# Altium PCB behind_v1.0.PcbDoc
Units mil, origin at the board's own origin, x right, y up, seen from the top; angles counter-clockwise.
Board outline 1210.03 x 2075.03 mil, 2 copper layers (Top Layer, Bottom Layer); 14 components, 19 nets, 44 pads, 3 vias.
Unrouted connection lines stored in the file: 7.
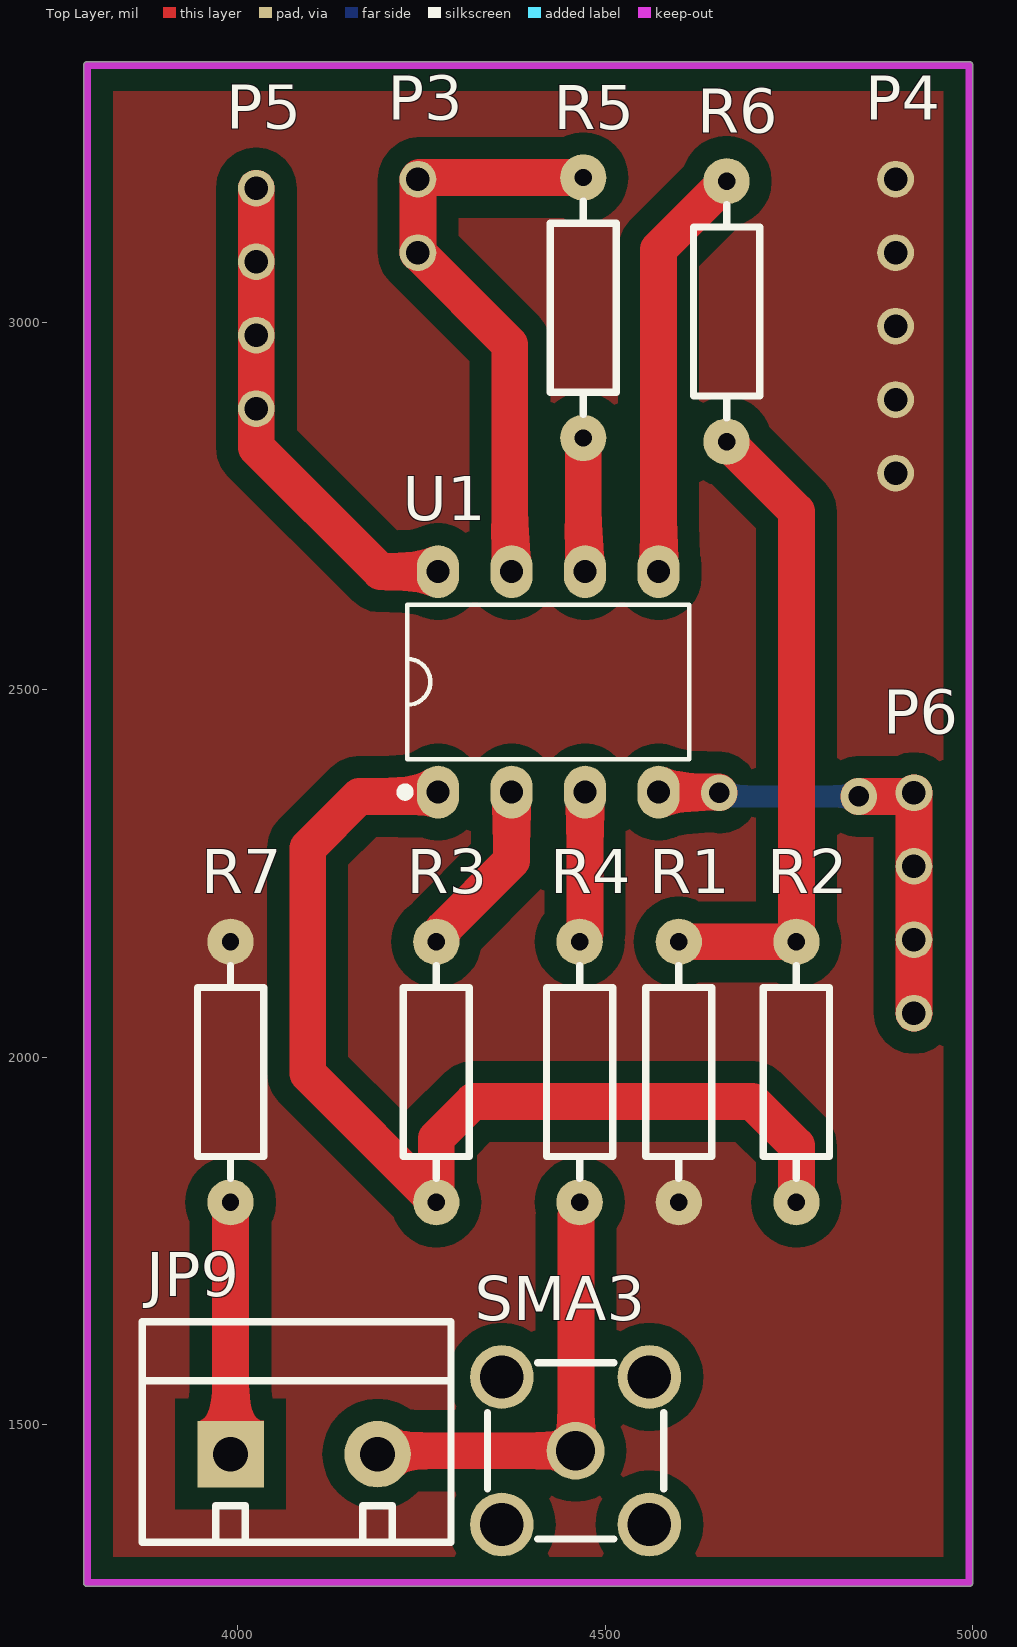
[diagram p0: Top Layer view]
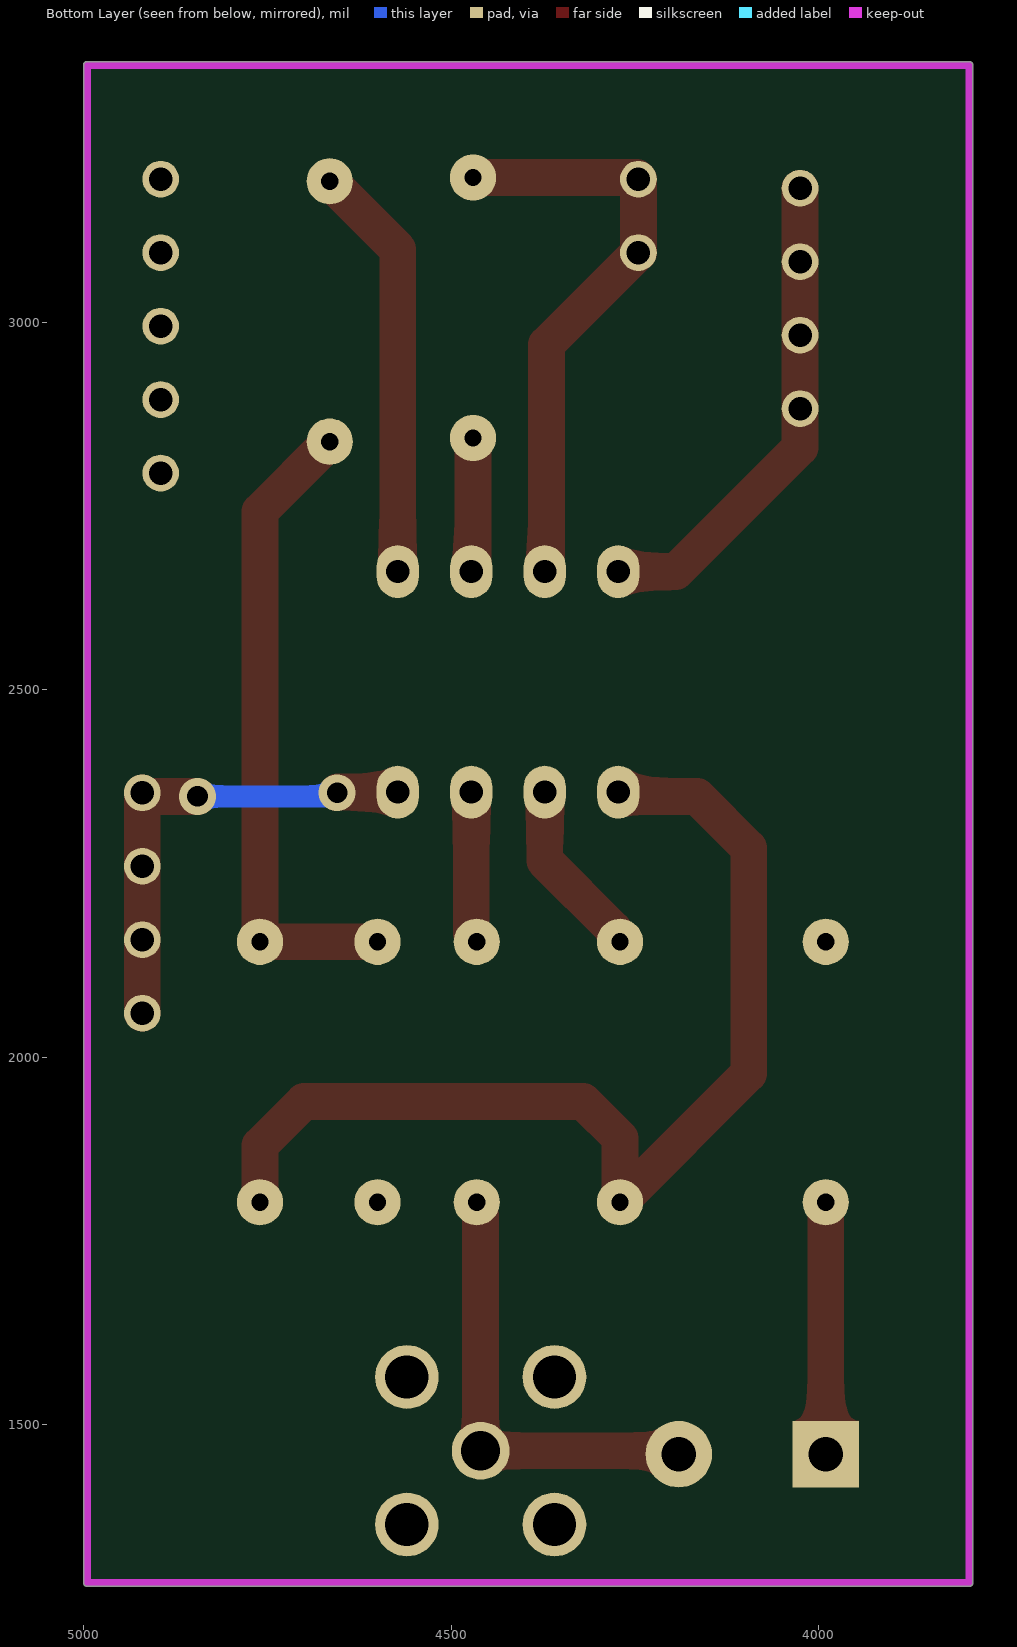
[diagram p1: Bottom Layer view, seen from below]

## Layer stack, top to bottom
Top Solder: solder mask 0.4, Solder Resist, Dk 3.5
Top Layer: signal copper 1.4
Dielectric 1: dielectric 12.6, FR-4, Dk 4.8
Bottom Layer: signal copper 1.4
Bottom Solder: solder mask 0.4, Solder Resist, Dk 3.5

## Board outline
3789.99,1285 3789.98,3350 cw(c3795,3350) 3795,3355.01 4995,3355.01 cw(c4995,3350) 5000.01,3350 5000.02,1285 cw(c4995,1285) 4995,1279.98 3795,1279.98 cw(c3795,1285)

## Design rules (kind name [scope] priority, off if disabled: settings)
Clearance [All] p1: gap=30 ignorepadtopadclearanceinfootprint=FALSE except(20: Arc-Hole Track-Hole SMDPad-Hole THPad-Hole Via-Hole Fill-Hole Poly-Hole Region-Hole Text-Hole)
PolygonConnect [All] p1: connectstyle=Direct reliefconductorwidth=10 reliefentries=4 polygonreliefangle="90 Angle" airgapwidth=10
RoutingVias [All] p1: holewidth=28 width=50 viastyle="Through Hole" minholewidth=28 minwidth=50 maxholewidth=28 maxwidth=50
SolderMaskExpansion [All] p1: expansion=4 istentingtop=FALSE
Width [All] p1: maxlimit=300 minlimit=10 preferedwidth=30 minimp=50.000000 maximp=50.000000 favimp=50.000000
30 further rules are at their usual default settings.

## Components (designator, comment, footprint, x,y, rotation, side; value= is the part's Value field where it differs from the comment)
JP9 "HDR-1X2" KF301-5.0-2P 3990,1460 r0 top
P3 "DIP 1x2" HDR1X2_2.54_180 4245,3195 r0 top value=2.54
P4 "HDR1x5_2.54" HDR1X5_2.54_180 4895,3195 r0 top
P5 "HDR1x4_2.54" HDR1x4_2.54_180 4025,3182.66 r0 top
P6 "HDR1x4_2.54" HDR1x4_2.54_180 4920,2360 r0 top
R1 "30K" "RS 1/4W" 4600,1980 r270 top
R2 "90K" "RS 1/4W" 4760,1980 r90 top
R3 "10K" "RS 1/4W" 4270,1980 r90 top
R4 "10K" "RS 1/4W" 4465,1980 r90 top
R5 "10K" "RS 1/4W" 4470,3020 r90 top
R6 "10K" "RS 1/4W" 4665,3015 r270 top
R7 "2K" "RS 1/4W" 3990,1980 r90 top
SMA3 "HJ-SMA058" HJ-SMA058 4459.61,1464.61 r0 top
U1 "LM358P" LM358P 4420,2525 r0 top

## Footprints (in the part's own frame and the unit in brackets; to place one, negate y for a bottom-side part, rotate by r counter-clockwise, add the part's x,y. Pads: shape width x height; smd on the part's side, far side on the other; paste and mask are expansions set on the pad)
HDR1X2_2.54_180 [mil]
  round 50 hole 32: 1(0,0) 2(0,-100)
  body extent -49,-150 49,50, height 323
HDR1x4_2.54_180 [mil]
  round 50 hole 32: 1(0,0) 2(0,-100) 3(0,-200) 4(0,-300)
  body extent -49,-350 49,50, height 323
HDR1X5_2.54_180 [mil]
  round 50 hole 32: 1(0,0) 2(0,-100) 3(0,-200) 4(0,-300) 5(0,-400)
  body extent -49,-450 49,50, height 323
HJ-SMA058 [mm]
  round 2.2 hole 1.5: 1(-2.55,-2.55) 2(-2.55,2.55) 3(2.55,2.55) 4(2.55,-2.55)
  round 2 hole 1.35: 5(0,0)
  silkscreen extent -3.05,-3.05 3.05,3.05
KF301-5.0-2P [mm] "可拼接端子/6A"
  rect 2.3x2.3 hole 1.2: 1(0,0)
  round 2.3 hole 1.2: 2(5.08,0)
  silkscreen extent -3.05,-3.05 7.62,4.57, body extent -3,-3.09 7.5,4.51, height 10.05
LM358P [mm] "Ti"
  oval 1.46x1.825 hole 0.8: 1(-3.748,-4.168) 2(-1.208,-4.168) 3(1.332,-4.168) 4(3.872,-4.168) 5(3.872,3.452) 6(1.332,3.452) 7(-1.208,3.452) 8(-3.748,3.452)
  silkscreen extent -5.04,-4.32 4.93,2.31
"RS 1/4W" [mm] "直插色环电阻，脚距9mm，直径2.3mm"
  round 1.6 hole 0.6: 1(-4.5,0) 2(4.5,0)
  silkscreen extent -3.68,-1.14 3.68,1.14, body extent -4.72,-1.16 4.73,1.16, height 2.32

## Part data
JP9: library part "Header 2", "2P接插件", BOM名称=2P接插件, 版权归属=源创客, 学习资源=www.ooocke.com
P3: library part HDR1x2_2.54, "Header", Type="DIP 1x2"
P4 P5 P6: "Header"
R1 R2 R3 R4 R5 R6 R7: library part R-CRR, "直插色环电阻", BOM名称=色环电阻, 版权归属=源创客, 学习资源=www.ooocke.com

## Via types
v1: diameter 50, hole 28, Top Layer to Bottom Layer, 3 vias

## Nets (pads, with @x,y where several pads share a name; then routed paths per layer and width w, separated by ;. In a path a pad name is that pad's centre, name@x,y a point inside that pad or via, vN(x,y) a via of type N, cw(c..) or ccw(c..) an arc to the next point about the centre after c; other vN are vias at no path point)
+12: P5.1 P5.2 P5.3 P5.4 U1.8 | length 670.2
  Top Layer w50: P5.1 P5.2 P5.3 4025,2830 4194.07,2660.93 U1.8
-12: P6.1 P6.2 P6.3 P6.4 U1.4 | length 652.1
  Top Layer w50: U1.4 4654.07,2360.93 v1(4655,2360) ; v1(4845,2355) 4915,2355 v1(4920,2360) P6.2 P6.3 P6.4
  Bottom Layer w30: v1(4655,2360) 4660,2355 v1(4845,2355)
ADC: R1.1 R2.2 R6.2 | length 880
  Top Layer w50: R1.1 R2.2 4760,2742.83 R6.2
GND: P4.1 P4.2 P4.3 P4.4 P4.5 R1.2 R7.2
NetJP1_1: 
NetJP1_2: 
NetJP2_2: 
NetJP3_1: 
NetJP4_2: 
NetJP5_2: 
NetJP6_1: 
NetJP9_1: JP9.1 R7.1 | length 342.8
  Top Layer w50: JP9.1 R7.1
NetJP9_2: JP9.2 R4.1 SMA3.5 | length 612
  Top Layer w50: JP9.2 4194.61,1464.61 SMA3.5 4460,1465 4460,1785.11 4461.56,1786.67 4461.56,1799.39 R4.1
NetP3_1: P3.1 P3.2 R5.2 U1.7 | length 812.8
  Top Layer w50: U1.7 4370,2663.39 4370,2970 P3.2 P3.1 4247.17,3197.17 R5.2
NetR2_1: R2.1 R3.1 U1.1 | length 1467
  Top Layer w50: R3.1 4270,1890 4320,1940 4700,1940 4760,1880 R2.1 ; R3.1@4272.45,1800.39 4095,1977.83 4095,2285 4165,2355 4266.69,2355 4272.46,2360.76 U1.1
NetR3_2: R3.2 U1.2 | length 246.2
  Top Layer w50: R3.2 4270,2162.03 4279,2171.03 4279,2174 4372.46,2267.46 U1.2
NetR4_2: R4.2 U1.3 | length 206.8
  Top Layer w50: R4.2 4465,2160.68 4472.46,2168.14 U1.3
NetR5_1: R5.1 U1.6 | length 197.5
  Top Layer w50: R5.1 4470,2663.39 U1.6 U1.6@4472.46,2675.55
NetR6_1: R6.1 U1.5 | length 571.6
  Top Layer w50: U1.5@4571.03,2662.36 U1.5 4572.46,3099.63 R6.1
pads on no net: SMA3.1 SMA3.2 SMA3.3 SMA3.4

## Polygon pours and split planes (outlines as drawn)
GND on Top Layer "NONET_L-01_P-001" (solid, pour order 0): 3795,3350 4995,3350 4995,1285 3795,1285

## Keep-outs
Top Layer:
  lines w10: 4995,3350 4995,3350
Keep-Out Layer:
  lines w10: 3795,1285 4995,1285 4995,3350 3795,3350 3795,1285